# EAGLE board Tube Power Supply Block (EAGLE 5.11)
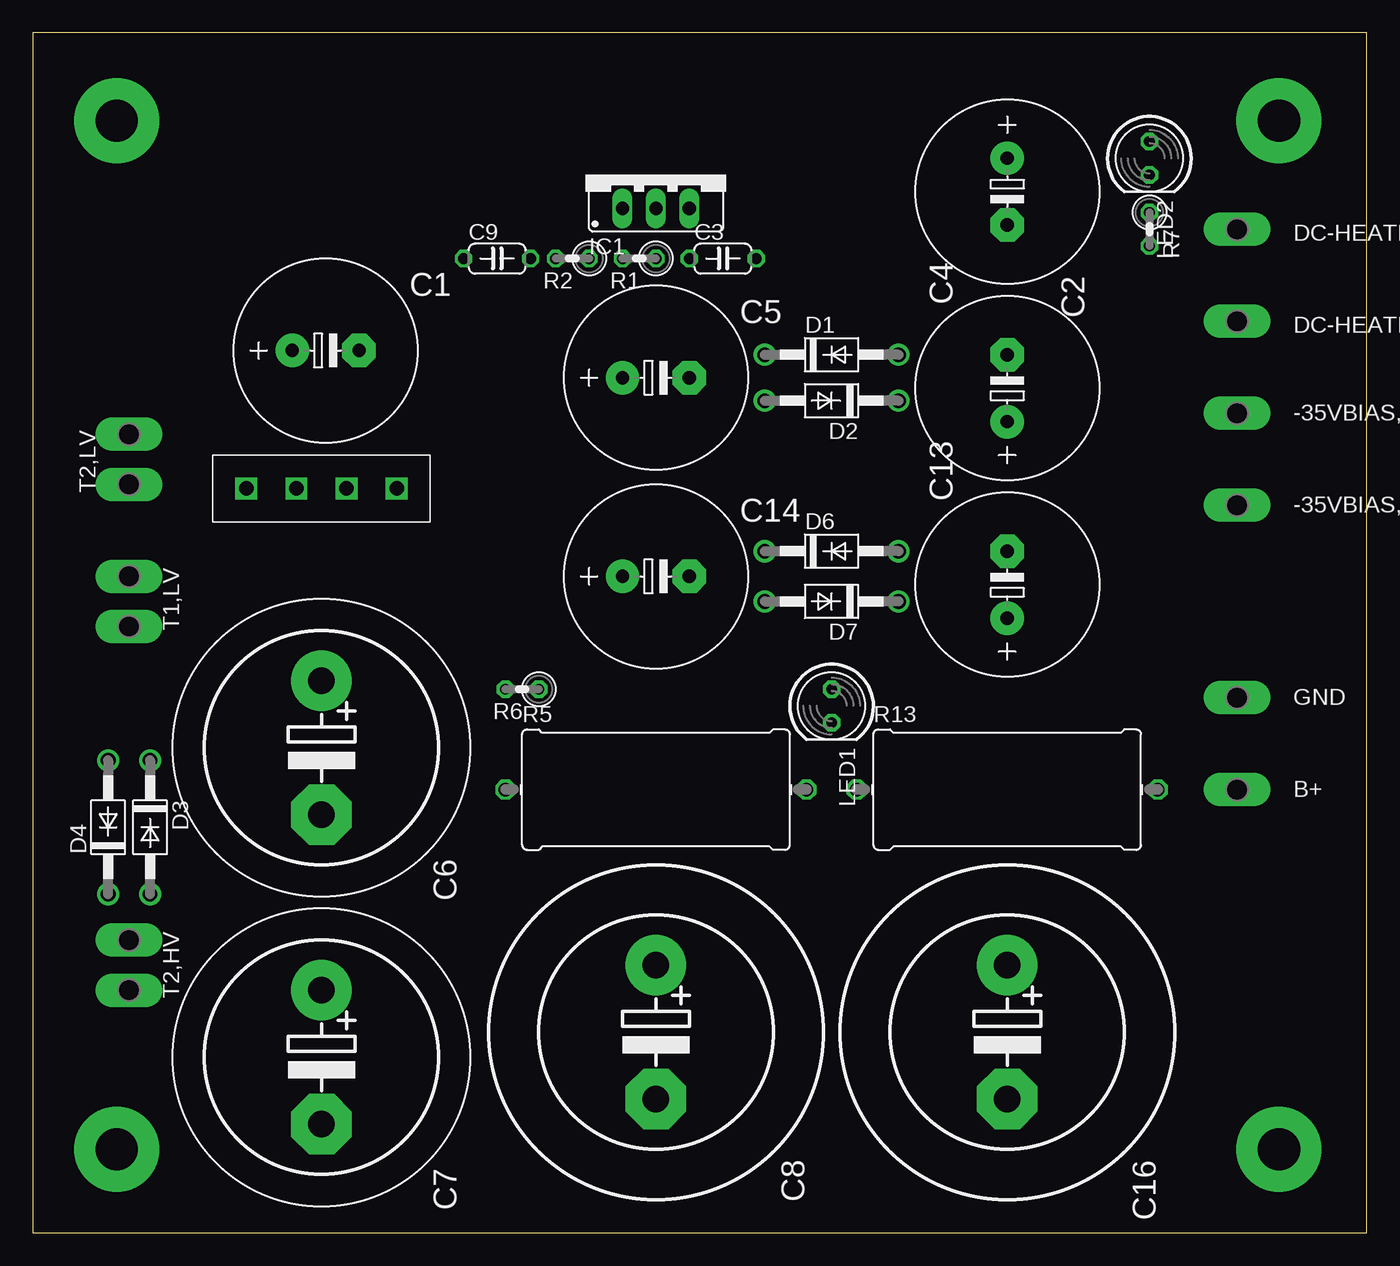
[diagram p0: board, top side]
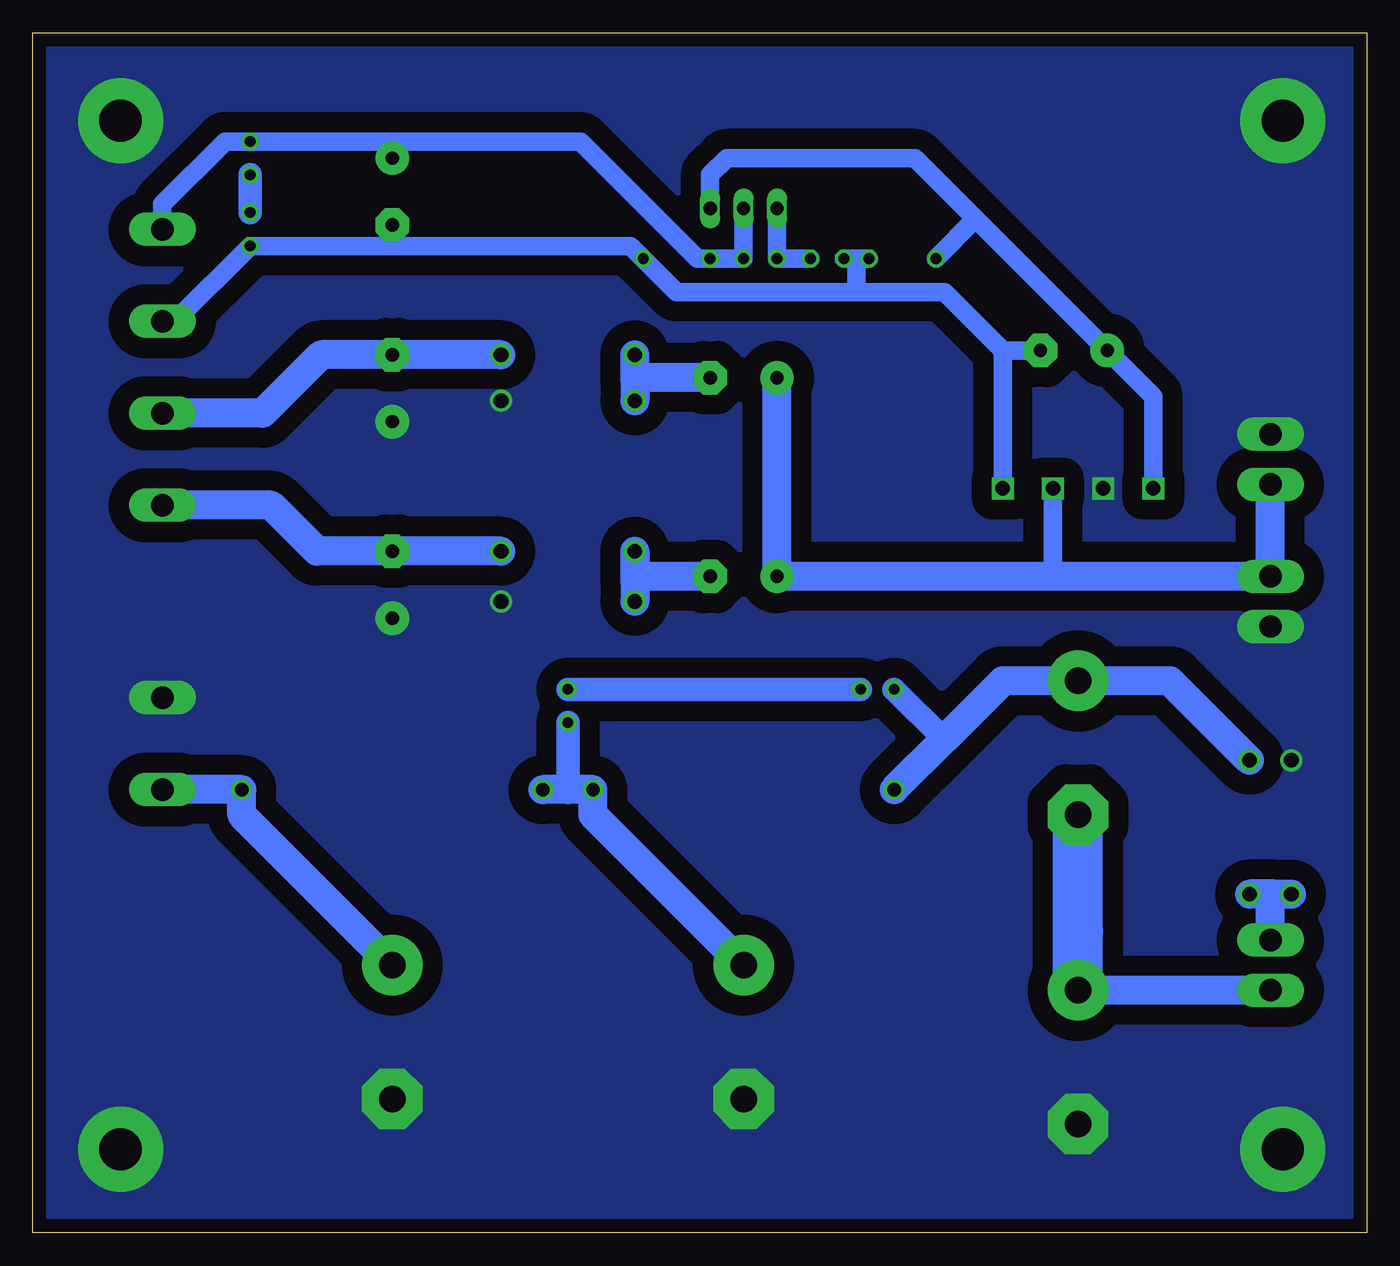
[diagram p1: board, bottom side, seen from below]

Size 101.26 x 91.11 mm. Coordinates in mm from the lower left corner, seen from the top.
Outline: 0,0 101.26,0 101.26,91.11 0,91.11 0,0
Copper layers (1*16): Top 0.035mm / dielectric 1.5mm / Bottom 0.035mm
Design rules "default *": minimum track width 10mil, minimum drill 24mil, track to track 60mil, track to pad 60mil, pad to pad 60mil, via to via 60mil, smd to smd 60mil, copper to edge 40mil, drill to drill 8mil, minimum pad ring 10mil, minimum via ring 8mil, stop-mask expansion 4mil, vias tented up to drill 0mil, thermal gap 10mil

## Footprints (pad centres in the part's own frame; a part is rotated, then mirrored left to right if it is on the bottom)
P1-17Y = drill 1.702 pad 2.121 long: TP 0,0
E5-13 = drill 1.016 pad 2.54 round: + -2.54,0 | drill 1.016 pad 2.54 octagon: - 2.54,0
C050-024X044 = drill 0.813 octagon: 1 -2.54,0; 2 2.54,0
EB22,5D = drill 2.007 pad 4.597 round: + -5.08,0 | drill 2.007 pad 4.597 octagon: - 5.08,0
EB25D = drill 2.007 pad 4.597 round: + -5.08,0 | drill 2.007 pad 4.597 octagon: - 5.08,0
DO41-10 = drill 1.118 round: A 5.08,0; C -5.08,0
317TS = drill 1.016 long: 1 -2.54,-2.54; 2 0,-2.54; 3 2.54,-2.54
LED5MM = drill 0.813 octagon: A -1.27,0; K 1.27,0
0207/2V = drill 0.813 octagon: 1 -1.27,0; 2 1.27,0
0922/22 = drill 1.016 octagon: 1 -11.43,0; 2 11.43,0
P2-38-17 = drill 1.702 pad 2.121 long: TP-1 -1.905,0; TP-2 1.905,0
FULL_BRIDGE = drill 1.1 square: + -3.81,0; - 7.62,0; A 3.81,0; B 0,0

## Placement (x,y rotation side)
-35VBIAS,1  PTR1PAD1-17Y  [P1-17Y]  91.44,62.23 90 top
-35VBIAS,2  PTR1PAD1-17Y  [P1-17Y]  91.44,55.24 90 top
B+  PTR1PAD1-17Y  [P1-17Y]  91.44,33.66 90 top
C1  1000uF  [E5-13]  22.23,66.99 0 top
C2  1000uF  [E5-13]  73.98,79.06 270 top
C3  1uF  [C050-024X044]  52.39,73.98 0 top
C4  470uF  [E5-13]  73.98,64.14 90 top
C5  470uF  [E5-13]  47.31,64.93 0 top
C6  470uF  [EB22,5D]  21.91,36.83 270 top
C7  470uF  [EB22,5D]  21.91,13.34 270 top
C8  100uF  [EB25D]  47.31,15.24 270 top
C9  .1uF  [C050-024X044]  35.24,73.98 0 top
C13  470uF  [E5-13]  73.98,49.21 90 top
C14  470uF  [E5-13]  47.31,49.85 0 top
C16  100uF  [EB25D]  73.98,15.24 270 top
D1  1N4002  [DO41-10]  60.64,66.67 0 top
D2  1N4002  [DO41-10]  60.64,63.18 180 top
D3  1N4007  [DO41-10]  8.89,30.8 270 top
D4  1N4007  [DO41-10]  5.71,30.8 90 top
D6  1N4002  [DO41-10]  60.64,51.75 0 top
D7  1N4002  [DO41-10]  60.64,47.94 180 top
DC-HEATER+  PTR1PAD1-17Y  [P1-17Y]  91.44,76.2 90 top
DC-HEATER-  PTR1PAD1-17Y  [P1-17Y]  91.44,69.22 90 top
GND  PTR1PAD1-17Y  [P1-17Y]  91.44,40.64 90 top
IC1  LM317  [317TS]  47.31,80.33 0 top
LED1  BLUE  [LED5MM]  60.64,40.01 270 top
LED2  GREEN  [LED5MM]  84.77,81.6 270 top
R1  240R  [0207/2V]  46.04,73.98 180 top
R2  2.2K  [0207/2V]  40.96,73.98 180 top
R5  100R 1W  [0922/22]  47.31,33.66 0 top
R6  470R  [0207/2V]  37.15,41.27 180 top
R7  1K  [0207/2V]  84.77,76.2 270 top
R13  100R 1W  [0922/22]  73.98,33.66 0 top
T1,LV  PTR2  [P2-38-17]  7.3,47.94 270 top
T2,HV  PTR2  [P2-38-17]  7.3,20.32 270 top
T2,LV  PTR2  [P2-38-17]  7.3,58.74 90 top
U$1  FULL_BRIDGE  [FULL_BRIDGE]  20,56.52 0 top

## Library data of the parts
-35VBIAS,1 -35VBIAS,2 B+ DC-HEATER+ DC-HEATER- GND T1,LV T2,HV T2,LV = testpad
C1-C9 C13 C14 C16 = rcl
D1-D4 D6 D7 = diode
IC1 = v-reg
LED1 LED2 = led
R1 R2 R5-R7 R13 = resistor
U$1 = tc's LIB

## Nets
-35VBIAS,1: -35VBIAS,1.TP C4.- D1.A
-35VBIAS,2: -35VBIAS,2.TP C13.- D6.A
DC-HEATER: C2.+ C3.1 DC-HEATER+.TP IC1.2 LED2.A R1.1
GND: C4.+ C7.- C8.- C13.+ C16.- D2.C D4.A D7.C GND.TP T1,LV.TP-2 T2,LV.TP-2 U$1.B
HEATER: C5.+ C14.+ T1,LV.TP-1 T2,LV.TP-1 U$1.A
N$1: B+.TP C16.+ R13.2
N$2: C1.+ C9.1 IC1.3 U$1.+
N$3: IC1.1 R1.2 R2.1
N$6: C1.- C2.- C3.2 C9.2 DC-HEATER-.TP R2.2 R7.2 U$1.-
N$9: C5.- D1.C D2.A
N$11: LED1.A R6.1
N$12: D3.A D4.C T2,HV.TP-1
N$13: C6.- C7.+ T2,HV.TP-2
N$14: C6.+ D3.C R5.1 R6.2
N$15: LED2.K R7.1
N$23: C14.- D6.C D7.A
N$25: C8.+ LED1.K R5.2 R13.1

## Tracks (layer width: path | path; a pad name or v marks a point on that pad's centre or on a via)
-35VBIAS,1
  Bottom 2.184: D1.A C4.- 79.38,66.67 83.82,62.23 -35VBIAS,1.TP
-35VBIAS,2
  Bottom 2.184: D6.A C13.- 79.69,51.75 83.19,55.24 -35VBIAS,2.TP
DC-HEATER
  Bottom 1.422: IC1.2 R1.1 C3.1 50.8,73.98 59.69,82.87 73.98,82.87 | 73.98,82.87 LED2.A 86.68,82.87 91.44,78.11 DC-HEATER+.TP | 73.98,82.87 C2.+
GND  (via drill 3.2 pad 6.45)
  other vias: 6.35,84.45 6.35,6.35 94.61,6.35 94.61,84.45
  pour Bottom (no thermals): 0,0 0,91.44 101.28,91.44 101.28,0
HEATER
  Bottom 1.422: 23.81,49.85 U$1.A
  Bottom 2.184: T2,LV.TP-1 T1,LV.TP-1 23.81,49.85 C14.+ C5.+
N$1
  Bottom 2.184: C16.+ 85.41,31.75 R13.2 B+.TP
N$2
  Bottom 1.422: IC1.3 49.85,80.33 48.58,81.6 34.29,81.6 29.69,76.99 | U$1.+ 16.19,63.5 C1.+ 29.69,76.99 | 29.69,76.99 | 29.69,76.99 C9.1
N$3
  Bottom 1.422: IC1.1 R1.2 R2.1
N$6
  Bottom 1.422: 38.73,73.98 C9.2 | 38.73,73.98 R2.2 | 38.73,71.44 38.73,73.98 | U$1.- 27.62,66.99 | 27.62,66.99 C1.- | 38.73,71.44 52.39,71.44 C3.2 55.88,74.93 73.98,74.93 | 38.73,71.44 32.07,71.44 27.62,66.99 | 73.98,74.93 R7.2 90.49,69.22 DC-HEATER-.TP | 73.98,74.93 C2.-
N$9
  Bottom 2.184: 55.56,64.77 D2.A | 55.56,64.77 D1.C | C5.- 55.4,64.93 55.56,64.77
N$11
  Bottom 1.778: R6.1 LED1.A
N$12
  Bottom 2.184: 6.99,25.72 D4.C | 6.99,25.72 D3.A | T2,HV.TP-1 7.3,25.4 6.99,25.72
N$13
  Bottom 1.778: 21.91,22.86 21.59,23.18
  Bottom 2.184: T2,HV.TP-2 C7.+
  Bottom 3.81: C7.+ 21.91,22.86 C6.-
N$14
  Bottom 1.778: 32.07,37.47 R6.2
  Bottom 2.184: D3.C 14.92,41.91 C6.+ 27.62,41.91 32.07,37.47 R5.1
N$15
  Bottom 1.778: R7.1 LED2.K
N$23
  Bottom 2.184: D7.A D6.C 55.56,49.53 55.24,49.85 C14.-
N$25
  Bottom 1.778: 60.64,33.66 LED1.K
  Bottom 2.184: C8.+ 58.74,31.75 R5.2 60.64,33.66 R13.1